# Altium PCB Weather Station PCB.PcbDoc
Units mm, origin at the board's own origin, x right, y up, seen from the top; angles counter-clockwise.
Board outline 62 x 38.05 mm, 2 copper layers (Top Layer, Bottom Layer), stack 1.671 mm thick; 27 components, 14 nets, 107 pads, 21 vias.
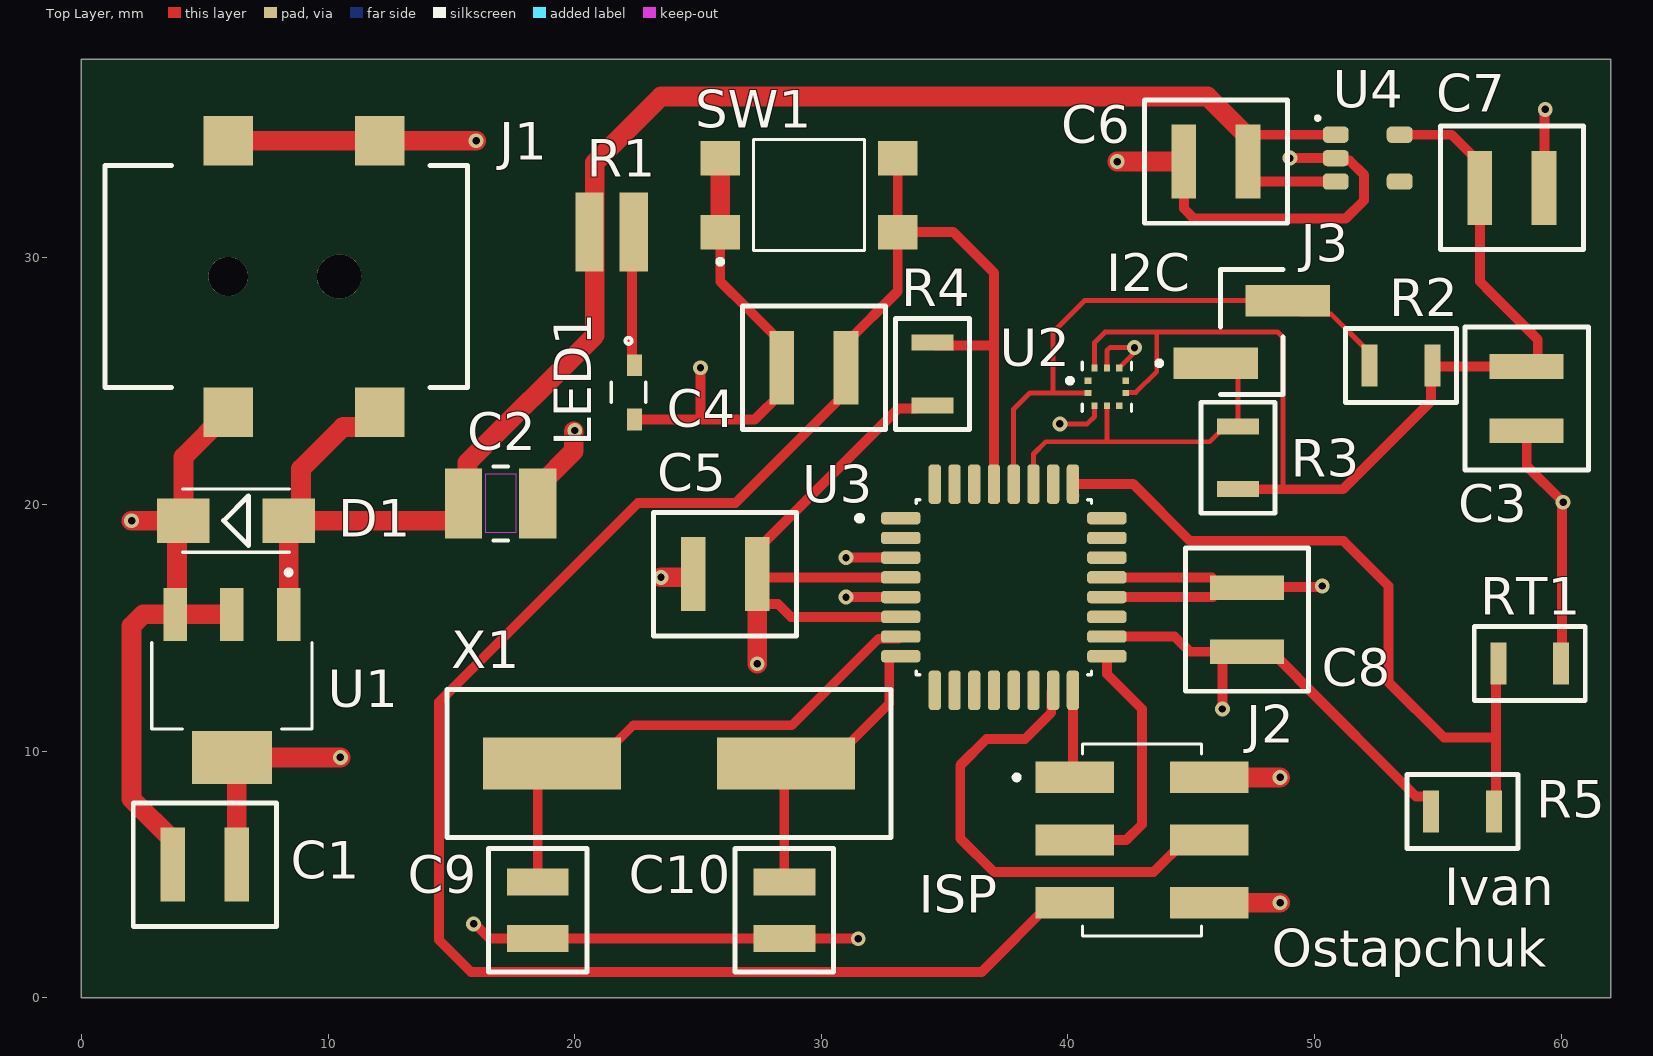
[diagram p0: Top Layer view]
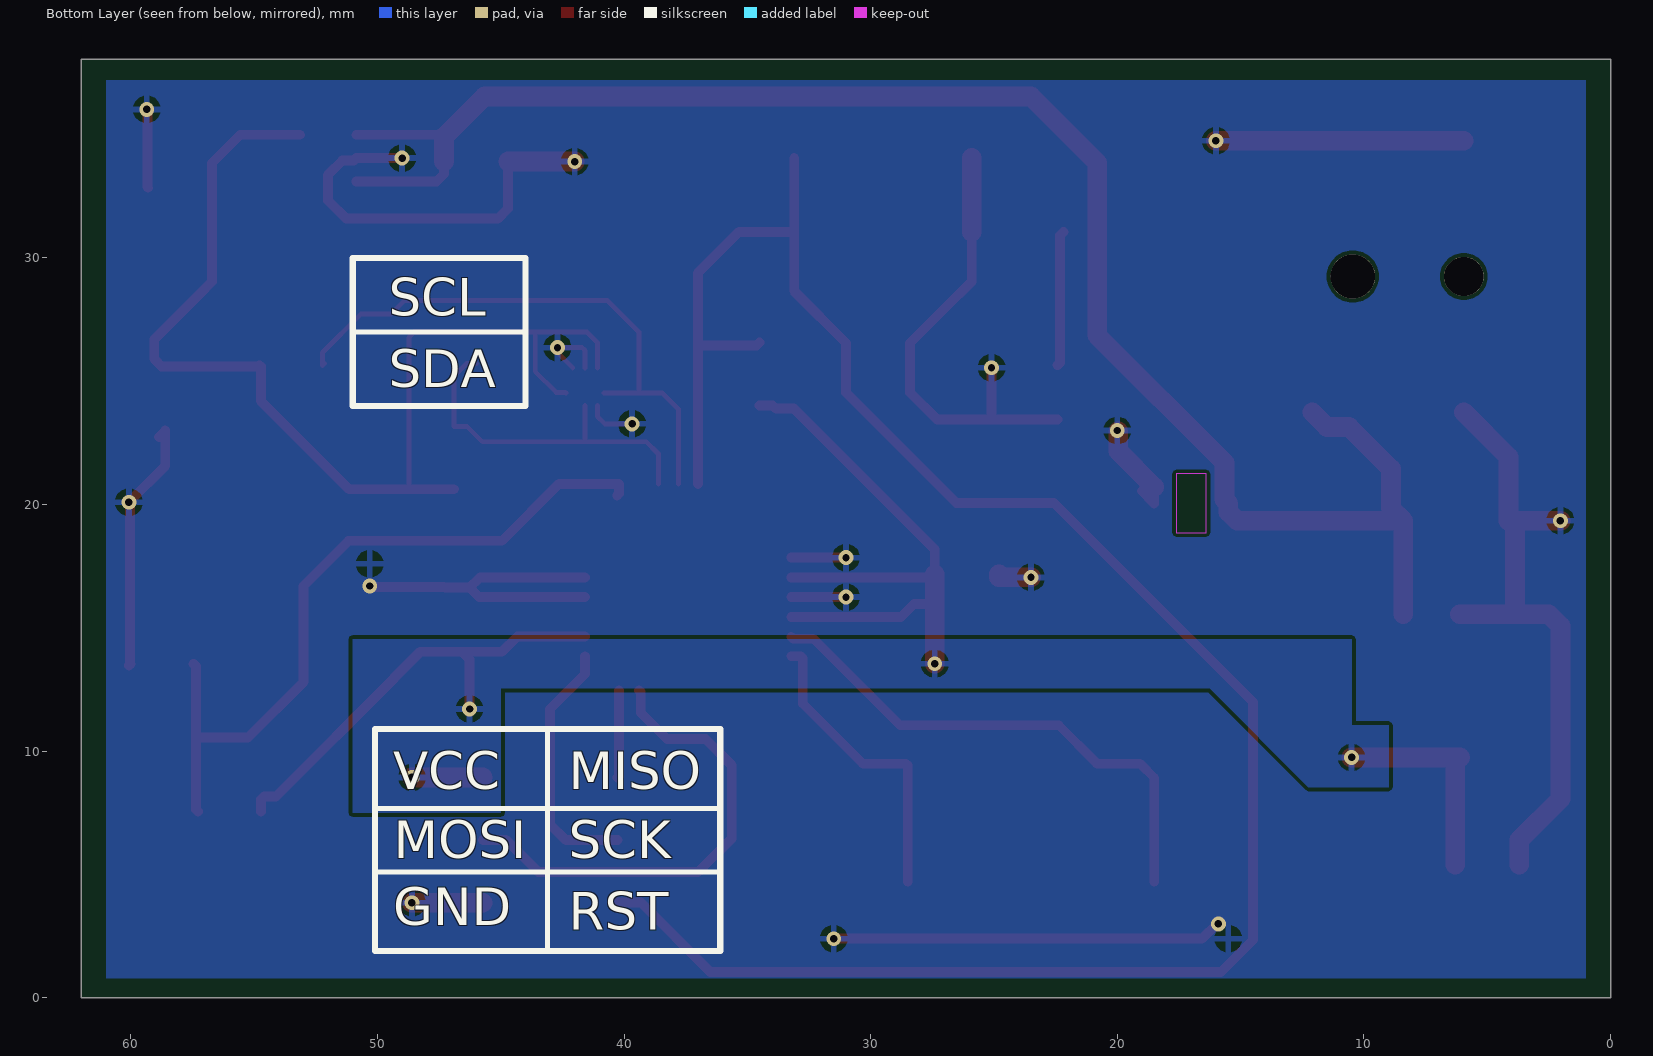
[diagram p1: Bottom Layer view, seen from below]
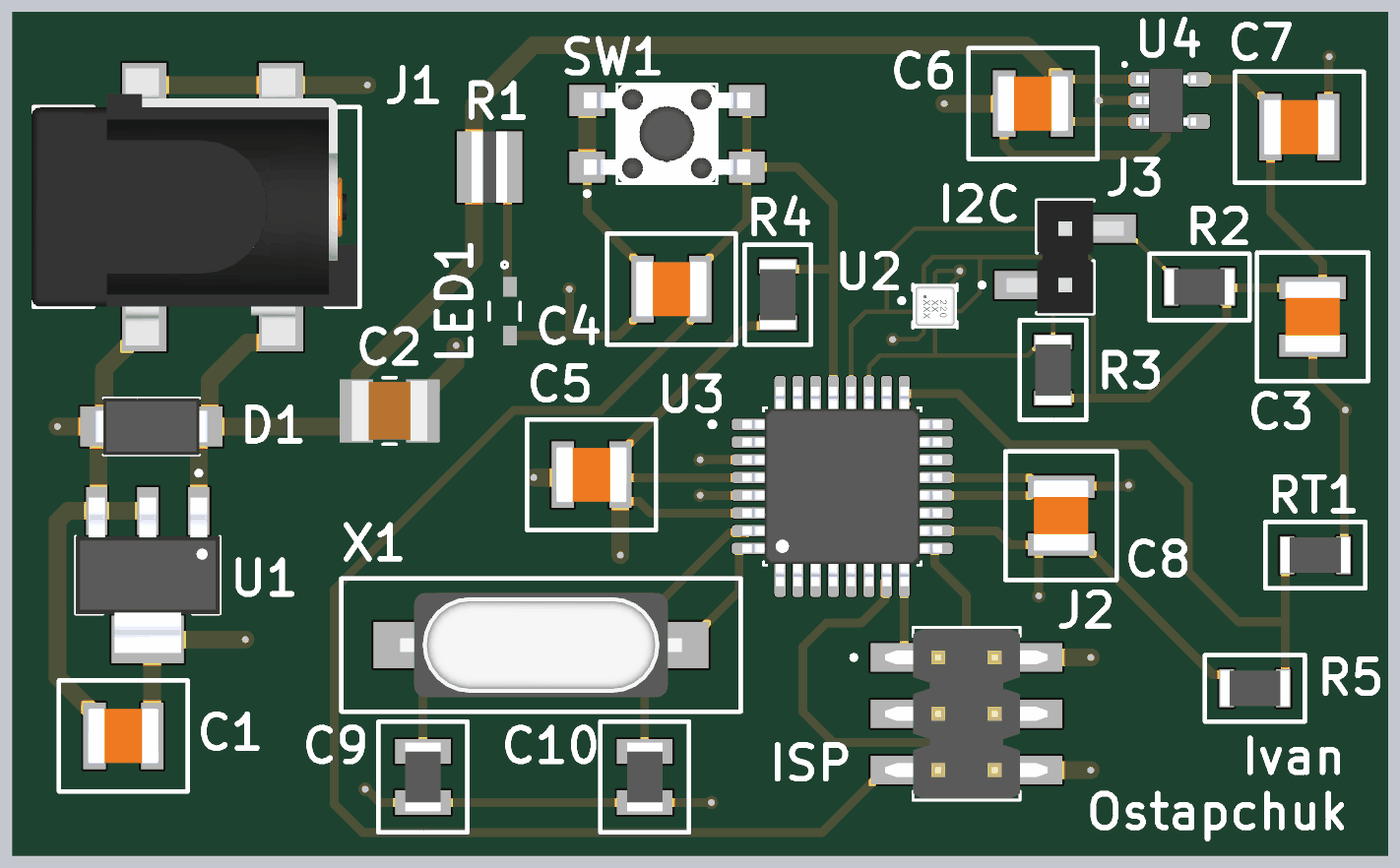
[diagram p2: 3D render of the assembled board from above, using the file's embedded part models]

## Layer stack, top to bottom
Top Solder: solder mask 0.0102, Solder Resist, Dk 3.5
Top Layer: signal copper 0.0356
Dielectric 1: dielectric 1.6, FR-4, Dk 4.8
Bottom Layer: signal copper 0.0356
Bottom Solder: solder mask 0.0102, Solder Resist, Dk 3.5

## Board outline
0,0 0,38.05 62,38.05 62,0

## Design rules (kind name [scope] priority, off if disabled: settings)
Clearance [All] p1: gap=0.15 ignorepadtopadclearanceinfootprint=FALSE
MinimumSolderMaskSliver [All] p1: minsoldermaskwidth=0.15
PolygonConnect [All] p1: connectstyle=Relief reliefconductorwidth=0.254 reliefentries=4 polygonreliefangle="90 Angle" airgapwidth=0.254
RoutingVias RoutingVias_1 [All] p1: holewidth=1 width=2 viastyle="Through Hole" minholewidth=1 minwidth=2 maxholewidth=1 maxwidth=2
SilkToSolderMaskClearance [IsPad] p1: minsilkscreentomaskgap=0.15 clearancetoexposedcopper=FALSE
SolderMaskExpansion [All] p1: expansion=0.102 istentingtop=FALSE
Width [All] p1: maxlimit=0.8 minlimit=0.2 preferedwidth=0.4
28 further rules are at their usual default settings.

## Components (designator, comment, footprint, x,y, rotation, side; value= is the part's Value field where it differs from the comment)
C1 "0.1 uF" 1210B104K500CT 5,5.4 r180 top
C2 "0.22uF" "Ceramic Cap 0.22uF 1210 Low density" 17,20.05 r0 top
C3 "0.1 uF" 1210B104K500CT 58.6,24.3 r90 top
C4 "0.1 uF" 1210B104K500CT 29.7,25.55 r0 top
C5 "0.1 uF" 1210B104K500CT 26.1,17.179 r0 top
C6 "0.1 uF" 1210B104K500CT 46,33.909 r180 top
C7 "0.1 uF" 1210B104K500CT 58,32.847 r0 top
C8 "0.1 uF" 1210B104K500CT 47.262,15.333 r270 top
C9 "30pF" "Kyocera 1210 Ceramic Capacitor" 18.5,3.55 r90 top
C10 "30pF" "Kyocera 1210 Ceramic Capacitor" 28.5,3.55 r90 top
D1 "TVS Protection" "Unidirectional TVS protection diode" 6.266,19.35 r0 top
J1 "DC Barrel Jack" "Power Barrel Jack" 8.3,29.25 r270 top
J2 "2x3 male header ISP" "2x3 male header ISP" 43,6.4 r270 top
J3 "2 PIN MALE HEADER" "2 pin male header smd" 47.45,27 r270 top
LED1 "Green LED IF 5mA" "SMD LED" 22.185,24.55 r270 top
R1 "620R" "1206 WIDE SMD Resistor" 21.5,31.05 r180 top
R2 "1kR" "Yageo 1206 SMD Resistor" 53.5,25.644 r180 top
R3 "1kR" "Yageo 1206 SMD Resistor" 46.9,21.9 r90 top
R4 "20kR" "Yageo 1206 SMD Resistor" 34.5,25.3 r90 top
R5 "10k" "Yageo 1206 SMD Resistor" 56,7.55 r0 top
RT1 "Thermistor 10K" "Yageo 1206 SMD Resistor" 58.725,13.55 r180 top
SW1 "Tactile Switch SPST" "Tactile Switch" 29.5,32.55 r90 top
U1 "Linear V Regulator" LM7805MP/NOPB 6.1,12.65 r270 top
U2 "Pressure Sensor" XDCR_ENS220S-BLGT 41.58,24.775 r0 top
U3 "MCU ATMEGA-328P" QFP80P900X900X120-32N 37.4,16.65 r0 top
U4 "LDO Regulator 1.8V" "LDO 1.8V" 52,34.05 r0 top
X1 "12.MHz" ABLS-12.000MHZ-20-B-3-H-T 23.825,9.5 r180 top

## Footprints (in the part's own frame and the unit in brackets; to place one, negate y for a bottom-side part, rotate by r counter-clockwise, add the part's x,y. Pads: shape width x height; smd on the part's side, far side on the other; paste and mask are expansions set on the pad)
"2 pin male header smd" [mm] "SAMTEC_TSM-102-01-X-SV"
  rect 1.27x3.43 smd: 1(1.27,-1.46) 2(-1.27,1.46)
  silkscreen extent -2.54,-3.85 2.54,1.27, body extent -2.54,-2.64 2.54,2.64, height 9.66
"2x3 male header ISP" [mm] "AMPHENOL_10125394-T0803ALF"
  rect 1.27x3.18 smd: 1(-2.54,-2.73) 2(0,-2.73) 3(2.54,-2.73) 4(2.54,2.73) 5(0,2.73) 6(-2.54,2.73)
  silkscreen extent -3.89,-5.18 3.89,2.41, body extent -3.81,-3.68 3.81,3.68, height 9.69
"1206 WIDE SMD Resistor" [mm] "RESC1632X65N"
  rect 1.15x3.2 smd: 1(-0.9,0) 2(0.9,0)
  body extent -0.8,-1.6 0.8,1.6, height 0.66
1210B104K500CT [mm]
  rect 1x3 smd: 1(-1.3,0) 2(1.3,0)
  silkscreen extent -2.9,-2.5 2.9,2.5, body extent -1.6,-1.25 1.6,1.25, height 1.06
ABLS-12.000MHZ-20-B-3-H-T [mm]
  rect 5.6x2.1 smd: 1(-4.75,0) 2(4.75,0)
  silkscreen extent -9,-3 9,3, body extent -6.35,-2.35 6.35,2.35, height 4.18
"Ceramic Cap 0.22uF 1210 Low density" [mil] "CAPC340270_100N_KEM-M"
  rect 59.4x112 smd paste+0 mask+0: 1(-59.23,0) 2(59.23,0)
  Top Layer keep-out region: -23.62,-47.24 -23.62,47.24 23.62,47.24 23.62,-47.24
  Keep-Out Layer region: -23.62,-47.24 -23.62,47.24 23.62,47.24 23.62,-47.24
  silkscreen extent -12,-59 12,59, body extent -67,-53 67,53, height 39
"Kyocera 1210 Ceramic Capacitor" [mm]
  rect 1.1x2.51 smd: 1(-1.15,0) 2(1.15,0)
  silkscreen extent -2.5,-2 2.5,2, body extent -1.55,-0.8 1.55,0.8, height 0.66
"LDO 1.8V" [mm] "SOT23-5P95_280X145XL45X37N"
  rrect53% 1.05x0.66 smd mask+0.05: 1(-1.14,0.95) 2(-1.14,0) 3(-1.14,-0.95) 4(1.45,-0.95) 5(1.45,0.95)
  silkscreen extent -1.9,1.6 -1.85,1.65, body extent -1.35,-1.45 1.35,1.45, height 1.45
LM7805MP/NOPB [mm] "Linear Voltage Regulator LM7805"
  rect 2.15x0.95 smd: 1(-2.9,2.3) 2(-2.9,0) 3(-2.9,-2.3)
  rect 2.15x3.25 smd: 4(2.9,0)
  silkscreen extent -4.7,-3.25 1.75,3.25, body extent -3.5,-3.25 3.5,3.25, height 1.8
"Power Barrel Jack" [mm] "GCT_DCJ200-05-A-XX-X_REVA"
  rect 2x2 smd: 1(-5.5,3.8) 1(-5.5,-2.35) 2(5.5,-2.35) 3(5.5,3.8)
  round 1.8 hole 1.8 unplated: ""(0,2.15)
  round 1.6 hole 1.6 unplated: ""(0,-2.35)
  silkscreen extent -4.5,-7.35 4.5,7.35, body extent -6.25,-7.45 6.25,7.25, height 11.01
QFP80P900X900X120-32N [mm]
  rrect53% 1.6x0.5 smd mask+0.05: 1(-4.18,2.8) 2(-4.18,2) 3(-4.18,1.2) 4(-4.18,0.4) 5(-4.18,-0.4) 6(-4.18,-1.2) 7(-4.18,-2) 8(-4.18,-2.8) 17(4.18,-2.8) 18(4.18,-2) 19(4.18,-1.2) 20(4.18,-0.4) 21(4.18,0.4) 22(4.18,1.2) 23(4.18,2) 24(4.18,2.8)
  rrect53% 0.5x1.6 smd mask+0.05: 9(-2.8,-4.18) 10(-2,-4.18) 11(-1.2,-4.18) 12(-0.4,-4.18) 13(0.4,-4.18) 14(1.2,-4.18) 15(2,-4.18) 16(2.8,-4.18) 25(2.8,4.18) 26(2,4.18) 27(1.2,4.18) 28(0.4,4.18) 29(-0.4,4.18) 30(-1.2,4.18) 31(-2,4.18) 32(-2.8,4.18)
  silkscreen extent -5.95,-3.55 3.55,3.55, body extent -4.5,-4.5 4.5,4.5, height 1.2
"SMD LED" [mil] "LED_IN-S85_INL"
  rect 35x24 smd paste+0 mask+0: 1(-43.31,9.5) 2(43.31,9.5)
  silkscreen extent -87,-28 16,28
"Tactile Switch" [mm] "SW_TL3305AF260QG"
  rect 1.4x1.6 smd: 1(-1.5,3.6) 2(-1.5,-3.6) 3(1.5,3.6) 4(1.5,-3.6)
  silkscreen extent -2.8,-2.25 2.25,3.7, body extent -2.25,-3.75 2.25,3.75, height 3.8
"Unidirectional TVS protection diode" [mil] "DIOM4325X250N"
  rect 84x70.87 smd: 1(-84,0) 2(84,0)
  silkscreen extent -85,-50 85,50, body extent -101,-50 101,50, height 99
XDCR_ENS220S-BLGT [mm]
  rect 0.275x0.25 smd mask+0.05: 1(-0.763,0.25) 2(-0.763,-0.25) 6(0.763,-0.25) 7(0.763,0.25)
  rect 0.25x0.275 smd mask+0.05: 3(-0.5,-0.763) 4(0,-0.763) 5(0.5,-0.763) 8(0.5,0.763) 9(0,0.763) 10(-0.5,0.763)
  silkscreen extent -1.6,-1 1,1, body extent -1,-1 1,1, height 0.75
"Yageo 1206 SMD Resistor" [mm] "RC1206FR-0720KL"
  rect 0.65x1.7 smd: 1(-1.275,0) 2(1.275,0)
  silkscreen extent -2.25,-1.5 2.25,1.5, body extent -1.55,-0.8 1.55,0.8, height 0.66

## Part data
C1 C3 C4 C5 C6 C7 C8: library part "Ceramic Cap, 0.1 uF, 10%, 50 V, 1210", "CerCapacitor, 0.1 uF, 10%, X7R, 50 V, 1210 [3225 Metric] Rohs Compliant: Yes", Capacitance=100nF, Case Code (Imperial)=1210, Case Code (Metric)=3225, Case/Package=Ceramic, Dielectric=X7R, Manufacturer="Walsin Technologies", Manufacturer Part Number=1210B104K500CT, Max Operating Temperature=125°C, Min Operating Temperature=-55°C, Supplier Part Number 1=1292-1618-6-ND, Tolerance=10%, Voltage Rating=50V, Category="Ceramic Capacitors", ComponentLink1Description=https://datasheet.ciiva.com/26864/getdatasheetpartid-414729-26864951.pdf?src-supplier=Verical, ComponentLink1URL=https://datasheet.ciiva.com/26864/getdatasheetpartid-414729-26864951.pdf?src-supplier=Verical, Depth=2.5mm, Lead Free=5697LeadFree, Length=3.2mm, Packaging="Tape and Reel", Pricing 1="1=0,23, 10=0,133, 50=0,0944, 100=0,0824, 500=0,06194, 1000=0,05558 (USD)", Radiation Hardening=No, Reach SVHC Compliant=Unknown, RoHS=Yes, RoHS Compliant=Yes, Stock 1=2921, Supplier 1=Digikey, Voltage Rating (DC)=50V
C2: library part "Ceramic Cap, 0.22uF, 10%, 50V, 1210", "Multilayer Ceramic Capacitors MLCC - SMD/SMT 50V 0.22uF X7R 1210 10%", Capacitance=220nF, Case Code (Imperial)=1210, Case Code (Metric)=3225, Dielectric=X7R, Dielectric Material=Ceramic, Manufacturer=KEMET, Manufacturer Part Number=C1210C224K5RACTU, Max Operating Temperature=125°C, Min Operating Temperature=-55°C, Package Quantity=1, Supplier Part Number 1=399-C1210C224K5RAC7800DKR-ND, Tolerance=10%, Voltage=50V, Case/Package=1210, Category="Ceramic Capacitors", ComponentLink1Description=https://datasheet.ciiva.com/5969/kem-c1002-x7r-smd-5969839.pdf?src-supplier=Farnell, ComponentLink1URL=https://datasheet.ciiva.com/5969/kem-c1002-x7r-smd-5969839.pdf?src-supplier=Farnell, ComponentLink2Description=https://datasheet.ciiva.com/7807/kem-c1002-x7r-smd-7807526.pdf?src-supplier=Element14, ComponentLink2URL=https://datasheet.ciiva.com/7807/kem-c1002-x7r-smd-7807526.pdf?src-supplier=Element14, ComponentLink3Description=https://datasheet.ciiva.com/28682/1851736-28682447.pdf?src-supplier=Element14, ComponentLink3URL=https://datasheet.ciiva.com/28682/1851736-28682447.pdf?src-supplier=Element14, Construction=Flat, Depth=2.5mm, Height=0.9mm, Lead Free=5697LeadFree, Length=3.2mm, Mount="Surface Mount,PCB", Number of Pins=2, Packaging="Tape and Reel", Pricing 1="1=0,26, 10=0,169, 50=0,1242, 100=0,1012, 500=0,07988, 1000=0,06745 (USD)", Radiation Hardening=No, Reach SVHC Compliant=No, RoHS=Yes, RoHS Compliant=Yes, Series=C, Stock 1=44512, Supplier 1=Digikey, Termination=SMD/SMT, Thickness=0.039inch, Voltage Rating=50V, Voltage Rating (DC)=50V, Width=0.098inch
C9 C10: library part "Ceramic Cap, 30pF, ±5%, 200V, 1210", "30 pF ±5% 200V Ceramic Capacitor C0G, NP0 1210 (3225 Metric)", Manufacturer="Kyocera AVX", Manufacturer Part Number=KGQ32DCG2D300JT, Supplier Part Number 1=478-KGQ32DCG2D300JTCT-ND, Pricing 1="1=0,65, 10=0,39, 50=0,2872, 100=0,2553, 500=0,20086, 1000=0,18387 (USD)", RoHS=No, Stock 1=5835, Supplier 1=Digikey
D1: library part "Unidirectional TVS protection Diode", "Unidirectional TVS protection. SMAJ Series 10 V 400 W SMT Uni-Directional Transient Voltage Suppressor - SMA", Manufacturer=Littelfuse, Manufacturer Part Number=SMAJ10A, Supplier Part Number 1=SMAJ10ALFCT-ND, Category="TVS Diodes", ComponentLink1Description=https://datasheet.ciiva.com/330/littelfuse-tvs-diode-smaj-datasheet-pdf-330790.pdf?src-supplier=Digikey, ComponentLink1URL=https://datasheet.ciiva.com/330/littelfuse-tvs-diode-smaj-datasheet-pdf-330790.pdf?src-supplier=Digikey, ComponentLink2Description=https://datasheet.ciiva.com/330/littelfuse-tvs-diode-smaj-datasheet-pdf-330791.pdf?src-supplier=Digikey, ComponentLink2URL=https://datasheet.ciiva.com/330/littelfuse-tvs-diode-smaj-datasheet-pdf-330791.pdf?src-supplier=Digikey, ComponentLink3Description=https://datasheet.ciiva.com/330/littelfuse-tvs-diode-smaj-datasheet-pdf-330792.pdf?src-supplier=Digikey, ComponentLink3URL=https://datasheet.ciiva.com/330/littelfuse-tvs-diode-smaj-datasheet-pdf-330792.pdf?src-supplier=Digikey, ComponentLink4Description=https://datasheet.ciiva.com/8062/littelfuse-tvs-diode-smaj-8062262.pdf?src-supplier=Element14, ComponentLink4URL=https://datasheet.ciiva.com/8062/littelfuse-tvs-diode-smaj-8062262.pdf?src-supplier=Element14, Pricing 1="1=0,4, 10=0,287, 100=0,1449, 500=0,12844, 1000=0,09996, 2000=0,08947 (USD)", RoHS=Yes, Stock 1=44201, Supplier 1=Digikey
J1: library part "Barrel Connector Jack", "Power Barrel Connector Jack 2.05mm ID (0.081\"), 5.50mm OD (0.217\") Surface Mount, Right Angle", Manufacturer="Global Connector Technology", Manufacturer Part Number=DCJ200-05-A-K1-A, Supplier Part Number 1=2073-DCJ200-05-A-K1-ACT-ND, Category=Connectors, ComponentLink1Description=https://datasheet.octopart.com/DCJ200-05-A-K1-A-Global-Connector-Technology-datasheet-77992270.pdf?src-supplier=Future+Electronics, ComponentLink1URL=https://datasheet.octopart.com/DCJ200-05-A-K1-A-Global-Connector-Technology-datasheet-77992270.pdf?src-supplier=Future+Electronics, ComponentLink2Description=https://gct.co/files/drawings/dcj200-05.pdf?src-supplier=Digikey, ComponentLink2URL=https://gct.co/files/drawings/dcj200-05.pdf?src-supplier=Digikey, ComponentLink3Description=https://datasheet.octopart.com/DCJ200-05-A-K1-A-Global-Connector-Technology-datasheet-91940685.pdf?src-supplier=Farnell, ComponentLink3URL=https://datasheet.octopart.com/DCJ200-05-A-K1-A-Global-Connector-Technology-datasheet-91940685.pdf?src-supplier=Farnell, ComponentLink4Description=http://www.farnell.com/cad/1884037.pdf?src-supplier=Element14, ComponentLink4URL=http://www.farnell.com/cad/1884037.pdf?src-supplier=Element14, Pricing 1="1=1,02, 10=0,859, 25=0,8236, 50=0,806, 100=0,771 (USD)", RoHS=Yes, Stock 1=1981, Supplier 1=Digikey
J2: "Bs Dr Vt SMT Hdr 2X3 TR-10125394-T0803ALF", Manufacturer="Amphenol Communications Solutions", Manufacturer Part Number=10125394-T0803ALF, Category="Backplane Connectors", Pricing 1="1=0,66, 10=0,5 (USD)", RoHS=No, Stock 1=2253, Supplier 1=Digikey
J3: library part "2 pin male header", "Conn Unshrouded Header HDR 2 POS 2.54mm Solder ST SMD Automotive T/R", Manufacturer=Samtec, Manufacturer Part Number=TSM-102-01-T-SV-TR, Supplier Part Number 1=SAM14779DKR-ND, Category="Headers and Wire Housings", ComponentLink1Description=http://www.farnell.com/datasheets/1927672.pdf?src-supplier=Farnell, ComponentLink1URL=http://www.farnell.com/datasheets/1927672.pdf?src-supplier=Farnell, ComponentLink2Description=https://datasheet.octopart.com/TSM-102-01-T-SV-TR-Samtec-datasheet-41643181.pdf?src-supplier=Newark, ComponentLink2URL=https://datasheet.octopart.com/TSM-102-01-T-SV-TR-Samtec-datasheet-41643181.pdf?src-supplier=Newark, ComponentLink3Description=http://suddendocs.samtec.com/catalog_english/tsm.pdf?src-supplier=Digikey, ComponentLink3URL=http://suddendocs.samtec.com/catalog_english/tsm.pdf?src-supplier=Digikey, ComponentLink4Description=http://www.samtec.com/documents/webfiles/pdf/TSM.PDF?src-supplier=Avnet, ComponentLink4URL=http://www.samtec.com/documents/webfiles/pdf/TSM.PDF?src-supplier=Avnet, ComponentLink5Description=https://datasheet.octopart.com/TSM-102-01-T-SV-TR-Samtec-datasheet-97319594.pdf?src-supplier=Sager+Electronics, ComponentLink5URL=https://datasheet.octopart.com/TSM-102-01-T-SV-TR-Samtec-datasheet-97319594.pdf?src-supplier=Sager+Electronics, ComponentLink6Description=https://datasheet.octopart.com/TSM-102-01-T-SV-TR-Samtec-datasheet-116533474.pdf?src-supplier=Toby+Electronics, ComponentLink6URL=https://datasheet.octopart.com/TSM-102-01-T-SV-TR-Samtec-datasheet-116533474.pdf?src-supplier=Toby+Electronics, ComponentLink7Description=https://datasheet.octopart.com/TSM-102-01-T-SV-TR-Samtec-datasheet-141160580.pdf?src-supplier=Master+Electronics, ComponentLink7URL=https://datasheet.octopart.com/TSM-102-01-T-SV-TR-Samtec-datasheet-141160580.pdf?src-supplier=Master+Electronics, Pricing 1="1=0,22 (USD)", RoHS=Yes, Stock 1=4232, Supplier 1=Digikey
LED1: "Side View / 0805 / 2.1 X 1.0 X 0", Manufacturer=Inolux, Manufacturer Part Number=IN-S85CS5G, Supplier Part Number 1=1830-IN-S85CS5GDKR-ND, Category=LEDs, Pricing 1="1=0,25, 10=0,166, 100=0,1109, 500=0,07668, 1000=0,0639 (USD)", RoHS=No, Stock 1=4626, Supplier 1=Digikey
R1: library part "SMD Resistor 620 Ohms, 1.5W 1206 WIDE", "620 Ohms ±1% 1.5W Chip Resistor Wide 1206 (3216 Metric), 0612 Automotive AEC-Q200, Pulse Withstanding Thick Film", Case Code (Imperial)=1206, Case Code (Metric)=3216, Case/Package=0612, Manufacturer=Rohm, Manufacturer Part Number=LTR18EZPF6200, Max Operating Temperature=155°C, Max Power Dissipation=750mW, Min Operating Temperature=-55°C, Ratings=AEC-Q200, Supplier Part Number 1=RHM620YCT-ND, Temperature Coefficient=100ppm/°C, Tolerance=1%, Voltage Rating=200V, Category="Chip SMD Resistors", ComponentLink1Description=https://datasheet.ciiva.com/2470/ltr-2470303.pdf?src-supplier=Digikey, ComponentLink1URL=https://datasheet.ciiva.com/2470/ltr-2470303.pdf?src-supplier=Digikey, ComponentLink2Description=https://datasheet.ciiva.com/2470/ltr-2470304.pdf?src-supplier=Digikey, ComponentLink2URL=https://datasheet.ciiva.com/2470/ltr-2470304.pdf?src-supplier=Digikey, ComponentLink3Description=https://datasheet.ciiva.com/2470/ltr-2470305.pdf?src-supplier=Digikey, ComponentLink3URL=https://datasheet.ciiva.com/2470/ltr-2470305.pdf?src-supplier=Digikey, Features="Automotive AEC-Q200", Number of Terminations=2, Packaging="Cut Tape", Pricing 1="1=0,2, 10=0,107, 50=0,073, 100=0,0629, 500=0,04618, 1000=0,0409 (USD)", Resistance=620R, RoHS=No, RoHS Compliant=No, Series=LTR, Stock 1=8335, Supplier 1=Digikey
R2 R3: library part "SMD Resistor 1 kOhm, 250mW, 1206", "SMD Chip Resistor, 1 kOhm, ± 1%, 250 mW, 1206 [3216 Metric], Thick Film, General Purpose", Case Code (Imperial)=1206, Case Code (Metric)=3216, Manufacturer=Yageo, Manufacturer Part Number=RC1206FR-071KL, Max Operating Temperature=155°C, Min Operating Temperature=-55°C, Power Rating=250mW, Resistance Tolerance=1%, Resistor Type="Thick Film", Supplier Part Number 1=311-1.00KFRDKR-ND, Temperature Coefficient=100ppm/°C, Voltage Rating=200V, Case/Package=1206, Category="Chip SMD Resistors", Depth=1.6mm, Height=0.55mm, Lead Free="Lead Free", Length=3.1mm, Packaging="Tape and Reel", Pricing 1="1=0,1, 10=0,038, 50=0,0244, 100=0,0206, 500=0,01434, 1000=0,01248 (USD)", Reach SVHC Compliant=Unknown, Resistance=1kR, RoHS=Yes, RoHS Compliant=Yes, Series=RC, Size Code=1206, Stock 1=367793, Supplier 1=Digikey, Technology="THICK FILM", Termination=SMD/SMT, Tolerance=1%, Voltage Rating (AC)=200V
R4: library part "SMD Resistor, 20k Ohm, 250mW, 1206", "20 kOhm, ± 1%, 250 mW, SMD Resistor, 1206 [3216 Metric], Thick Film, General Purpose", Manufacturer=Yageo, Manufacturer Part Number=RC1206FR-0720KL, Supplier Part Number 1=311-20.0KFRCT-ND, Voltage Rating (DC)=200V, Category="Chip SMD Resistors", ComponentLink1Description=http://www.yageo.com/documents/recent/PYu-RC_Group_51_RoHS_L_9.pdf?src-supplier=Digikey, ComponentLink1URL=http://www.yageo.com/documents/recent/PYu-RC_Group_51_RoHS_L_9.pdf?src-supplier=Digikey, ComponentLink2Description=http://www.yageo.com/documents/recent/PYu-RC_Group_51_RoHS_L_10.pdf?src-supplier=Digikey, ComponentLink2URL=http://www.yageo.com/documents/recent/PYu-RC_Group_51_RoHS_L_10.pdf?src-supplier=Digikey, Lead Free=5697LeadFree, Pricing 1="1=0,1, 10=0,038, 50=0,0244, 100=0,0206, 500=0,01434, 1000=0,01248 (USD)", RoHS=Yes, Stock 1=254185, Supplier 1=Digikey
R5: library part "SMD Resistor, 10 kOhm, 250 mW, 1206", "SMD Chip Resistor, 10 kOhm, 1%, 250 mW, 1206 [3216 Metric], Thick Film, General Purpose", Case Code (Imperial)=1206, Case Code (Metric)=3216, Manufacturer=Yageo, Manufacturer Part Number=RC1206FR-0710KL, Max Operating Temperature=155°C, Max Power Dissipation=250mW, Min Operating Temperature=-55°C, Package Quantity=5000, Resistance=10kR, Resistance Tolerance=1%, Resistor Type="Thick Film", Supplier Part Number 1=311-10.0KFRCT-ND, Temperature Coefficient=100ppm/°C, Voltage Rating=200V, Case/Package=1206, Category="Chip SMD Resistors", ComponentLink1Description=https://datasheet.ciiva.com/46445/444357-46445703.pdf?src-supplier=Element14, ComponentLink1URL=https://datasheet.ciiva.com/46445/444357-46445703.pdf?src-supplier=Element14, ComponentLink2Description=https://datasheet.ciiva.com/7857/1692832-7857244.pdf?src-supplier=Element14, ComponentLink2URL=https://datasheet.ciiva.com/7857/1692832-7857244.pdf?src-supplier=Element14, ComponentLink3Description=https://datasheet.ciiva.com/7857/1692832-7857245.pdf?src-supplier=Element14, ComponentLink3URL=https://datasheet.ciiva.com/7857/1692832-7857245.pdf?src-supplier=Element14, Features="Moisture Resistant", Height=0.55mm, Lead Free=5697LeadFree, Length=3.1mm, Number of Terminations=2, Packaging="Tape and Reel", Power Rating=250mW, Pricing 1="1=0,1, 10=0,038, 50=0,0244, 100=0,0206, 500=0,01434, 1000=0,01248 (USD)", Reach SVHC Compliant=Unknown, RoHS=Yes, RoHS Compliant=Yes, Series=RC, Size Code=1206, Stock 1=2825737, Supplier 1=Digikey, Termination=SMD/SMT, Tolerance=1%, Voltage Rating (AC)=200V, Width=1.6mm
RT1: library part "Thermistor NTC 10K", "Thermistor NTC 10K Ohm 10% 2-Pin 1206 Surface Mount Solder Pad 3510K Blister T/R", Case/Package=1206, Manufacturer="TDK EPCOS", Manufacturer Part Number=B57621C5103K062, Max Operating Temperature=125°C, Min Operating Temperature=-55°C, Package Quantity=4000, Power Rating=300mW, Resistance=10kR, Supplier Part Number 1=495-B57621C5103K062CT-ND, Tolerance=10%, Category=Thermistors, ComponentLink1Description=https://datasheet.ciiva.com/15097/getdatasheetpartid-382188-15097872.pdf?src-supplier=Verical, ComponentLink1URL=https://datasheet.ciiva.com/15097/getdatasheetpartid-382188-15097872.pdf?src-supplier=Verical, Depth=1.6mm, Height=1.3mm, Length=3.2mm, Number of Pins=2, Packaging="Tape and Reel", Pricing 1="1=1,17, 10=0,878, 25=0,7024, 100=0,6439, 500=0,5415, 1000=0,48295 (USD)", Radiation Hardening=No, RoHS=Yes, RoHS Compliant=Yes, Stock 1=7290, Supplier 1=Digikey, Termination=SMD/SMT, Weight=0.000635oz, Width=1.6mm
SW1: "TL3305A Series SPST 12 V 4.5 x 4.5 mm 260 gf Top Actuated SMT Tactile Switch", Manufacturer=E-Switch, Manufacturer Part Number=TL3305AF260QG, Max Operating Temperature=70°C, Min Operating Temperature=-20°C, Operating Force=260gf, Supplier Part Number 1=EG5353DKR-ND, Actuator Type=Standard, Category="Tactile Switches", ComponentLink1Description=http://www.farnell.com/datasheets/2554191.pdf?src-supplier=Farnell, ComponentLink1URL=http://www.farnell.com/datasheets/2554191.pdf?src-supplier=Farnell, ComponentLink2Description=http://www.farnell.com/datasheets/2554191.pdf?src-supplier=Newark, ComponentLink2URL=http://www.farnell.com/datasheets/2554191.pdf?src-supplier=Newark, ComponentLink3Description=http://spec_sheets.e-switch.com/specs/P010471.pdf?src-supplier=Mouser, ComponentLink3URL=http://spec_sheets.e-switch.com/specs/P010471.pdf?src-supplier=Mouser, ComponentLink4Description=http://www.farnell.com/datasheets/2554191.pdf?src-supplier=Element14, ComponentLink4URL=http://www.farnell.com/datasheets/2554191.pdf?src-supplier=Element14, ComponentLink5Description=http://spec_sheets.e-switch.com/specs/P010471.pdf?src-supplier=Digikey, ComponentLink5URL=http://spec_sheets.e-switch.com/specs/P010471.pdf?src-supplier=Digikey, ComponentLink6Description=http://spec_sheets.e-switch.com/specs/P010471.pdf?src-supplier=NAC+Semi, ComponentLink6URL=http://spec_sheets.e-switch.com/specs/P010471.pdf?src-supplier=NAC+Semi, Illumination Type=Non-Illuminated, Lead Free="Lead Free", Mechanical Life=200000Cycles, Mount="Surface Mount", Packaging="Cut Tape", Pricing 1="1=0,21, 10=0,205, 25=0,1944, 100=0,176, 250=0,16048, 500=0,14918, 1000=0,12726 (USD)", RoHS=No, Series=TL3305, Stock 1=157478, Supplier 1=Digikey, Switch Function=Off-Mom, Switch Travel=0.2mm, Termination="Gull Wing", Throw Configuration=SPST
U1: library part "Linear Voltage Regulator LM7805MP/NOPB", "1.5-A, 30-V, linear voltage regulator 4-SOT-223 0 to 125", Dropout Voltage=2V, Manufacturer="Texas Instruments", Manufacturer Part Number=LM7805MP/NOPB, Max Supply Voltage=30V, Min Supply Voltage=7.5V, Nominal Supply Current=8mA, Output Voltage=5V, Supplier Part Number 1=296-44517-1-ND, Accuracy=3%, Category="Voltage Regulators - Linear", ComponentLink1Description=http://www.ti.com/general/docs/suppproductinfo.tsp?distId=10&amp;gotoUrl=http%3A%2F%2Fwww.ti.com%2Flit%2Fgpn%2Flm340&src-supplier=Digikey, ComponentLink1URL=http://www.ti.com/general/docs/suppproductinfo.tsp?distId=10&amp;gotoUrl=http%3A%2F%2Fwww.ti.com%2Flit%2Fgpn%2Flm340&src-supplier=Digikey, Height=1.8mm, Lead Free=5698LeadFree, Length=6.5mm, Number of Outputs=1NUMBER, Number of Pins=4NUMBER, Pricing 1="1=1,73, 10=1,555, 25=1,4672, 100=1,2499, 250=1,1736, 500=1,02692 (USD)", RoHS=Yes, Stock 1=2585, Supplier 1=Digikey, Thickness=1.6mm, Width=3.5mm
U2: "Pressure Sensor 4.35PSI ~ 17.4PSI (30kPa ~ 120kPa) Absolute 24 b 10-LGA", Manufacturer=ScioSense, Manufacturer Part Number=ENS220S-BLGT, Supplier Part Number 1=2618-ENS220S-BLGTCT-ND, Pricing 1="1=3,45, 10=2,591, 25=2,3028, 50=2,1876, 100=2,1301, 500=1,78468, 1000=1,66953 (USD)", RoHS=No, Stock 1=2645, Supplier 1=Digikey
U3: "AVR series Microcontroller IC 8-Bit 2MHz 32KB (16K x 16) FLASH 32-TQFP (7x7)", Case/Package=TQFP, Manufacturer=Microchip, Manufacturer Part Number=ATMEGA328P-AUR, Max Frequency=20MHz, Max Operating Temperature=85°C, Max Supply Voltage=5.5V, Min Operating Temperature=-40°C, Min Supply Voltage=1.8V, Supplier Part Number 1=ATMEGA328P-AURCT-ND, Category=Microcontrollers, ComponentLink1Description=http://www.farnell.com/datasheets/2047852.pdf?src-supplier=Farnell, ComponentLink1URL=http://www.farnell.com/datasheets/2047852.pdf?src-supplier=Farnell, ComponentLink2Description=http://components.arrow.com/part/dataview/48719204S8832641N3744?src-supplier=Arrow+Electronics, ComponentLink2URL=http://components.arrow.com/part/dataview/48719204S8832641N3744?src-supplier=Arrow+Electronics, ComponentLink3Description=http://www.produktinfo.conrad.com/datenblaetter/1200000-1299999/001267077-da-01-en-IC_MCU_8BIT_3_ATMEGA328P_AUR_TQFP_32_ATM.pdf?src-supplier=Conrad, ComponentLink3URL=http://www.produktinfo.conrad.com/datenblaetter/1200000-1299999/001267077-da-01-en-IC_MCU_8BIT_3_ATMEGA328P_AUR_TQFP_32_ATM.pdf?src-supplier=Conrad, ComponentLink4Description=https://datasheet.octopart.com/ATMEGA328P-AUR-Microchip-datasheet-14421303.pdf?src-supplier=Newark, ComponentLink4URL=https://datasheet.octopart.com/ATMEGA328P-AUR-Microchip-datasheet-14421303.pdf?src-supplier=Newark, ComponentLink5Description=http://www.farnell.com/datasheets/2047852.pdf?src-supplier=Element14, ComponentLink5URL=http://www.farnell.com/datasheets/2047852.pdf?src-supplier=Element14, ComponentLink6Description=https://datasheet.octopart.com/ATMEGA328P-AUR-Microchip-datasheet-101746195.pdf?src-supplier=Future+Electronics, ComponentLink6URL=https://datasheet.octopart.com/ATMEGA328P-AUR-Microchip-datasheet-101746195.pdf?src-supplier=Future+Electronics, ComponentLink7Description=http://www.farnell.com/datasheets/1693866.pdf?src-supplier=Newark, ComponentLink7URL=http://www.farnell.com/datasheets/1693866.pdf?src-supplier=Newark, ComponentLink8Description=http://www.microchip.com/mymicrochip/filehandler.aspx?ddocname=en589968&src-supplier=Digikey, ComponentLink8URL=http://www.microchip.com/mymicrochip/filehandler.aspx?ddocname=en589968&src-supplier=Digikey, ComponentLink9Description=http://www.microchip.com/mymicrochip/filehandler.aspx?ddocname=en608326&src-supplier=Digikey, ComponentLink9URL=http://www.microchip.com/mymicrochip/filehandler.aspx?ddocname=en608326&src-supplier=Digikey, ComponentLink10Description=https://datasheet.octopart.com/ATMEGA328P-AUR-Microchip-datasheet-133520744.pdf?src-supplier=LKR, ComponentLink10URL=https://datasheet.octopart.com/ATMEGA328P-AUR-Microchip-datasheet-133520744.pdf?src-supplier=LKR, ComponentLink11Description=https://datasheet.octopart.com/ATMEGA328P-AUR-Microchip-datasheet-154741723.pdf?src-supplier=Electro+Sonic, ComponentLink11URL=https://datasheet.octopart.com/ATMEGA328P-AUR-Microchip-datasheet-154741723.pdf?src-supplier=Electro+Sonic, ComponentLink12Description=https://datasheet.octopart.com/ATMEGA328P-AUR-Microchip-datasheet-68295846.pdf?src-supplier=SHENGYU+ELECTRONICS, ComponentLink12URL=https://datasheet.octopart.com/ATMEGA328P-AUR-Microchip-datasheet-68295846.pdf?src-supplier=SHENGYU+ELECTRONICS, Contact Plating=154ConductorMaterial, Core Architecture=PIC, Data Bus Width=8b, Height=1.2mm, Interface=I2C,SPI,UART,USART, Lead Free=5697LeadFree, Memory Size=32KB, Memory Type=FLASH, Mount="Surface Mount", Number of ADC Channels=8NUMBER, Number of I2C Channels=1NUMBER, Number of I/Os=23, Number of Pins=32, Number of Programmable I/O=23NUMBER, Number of PWM Channels=6NUMBER, Number of SPI Channels=2NUMBER, Number of Timers/Counters=3NUMBER, Number of UART Channels=1NUMBER, Oscillator Type=Internal, Packaging="Cut Tape", Peripherals="Brown-out Detect/Reset,POR,PWM,WDT", Pricing 1="1=2,74, 25=2,54, 100=2,3 (USD)", RAM Size=2KB, Reach SVHC Compliant=4186SVHC, RoHS=Yes, RoHS Compliant=Yes, Series="PIC® 18F", Stock 1=111026, Supplier 1=Digikey, Watchdog Timer=5512WatchdogTimer
U4: "Linear Voltage Regulator IC Positive Fixed 1 Output 1.8V 300mA SOT-23-5", Manufacturer=Microchip, Manufacturer Part Number=MIC5504-1.8YM5-TR, Supplier Part Number 1=576-4879-6-ND, Category="Voltage Regulators - Linear", ComponentLink1Description=http://www.microchip.com/mymicrochip/filehandler.aspx?ddocname=en580292&src-supplier=Digikey, ComponentLink1URL=http://www.microchip.com/mymicrochip/filehandler.aspx?ddocname=en580292&src-supplier=Digikey, ComponentLink2Description=http://ww1.microchip.com/downloads/en/DeviceDoc/MIC550X.pdf?src-supplier=Farnell, ComponentLink2URL=http://ww1.microchip.com/downloads/en/DeviceDoc/MIC550X.pdf?src-supplier=Farnell, ComponentLink3Description=https://datasheet.octopart.com/MIC5504-1.8YM5-TR-Microchip-datasheet-137404938.pdf?src-supplier=Future+Electronics, ComponentLink3URL=https://datasheet.octopart.com/MIC5504-1.8YM5-TR-Microchip-datasheet-137404938.pdf?src-supplier=Future+Electronics, ComponentLink4Description=http://ww1.microchip.com/downloads/en/DeviceDoc/MIC550X.pdf?src-supplier=Newark, ComponentLink4URL=http://ww1.microchip.com/downloads/en/DeviceDoc/MIC550X.pdf?src-supplier=Newark, ComponentLink5Description=https://datasheet.octopart.com/MIC5504-1.8YM5-TR-Microchip-datasheet-137404938.pdf?src-supplier=Electro+Sonic, ComponentLink5URL=https://datasheet.octopart.com/MIC5504-1.8YM5-TR-Microchip-datasheet-137404938.pdf?src-supplier=Electro+Sonic, Pricing 1="1=0,16, 25=0,12, 100=0,11 (USD)", RoHS=Yes, Stock 1=215403, Supplier 1=Digikey
X1: library part ABLS-12.000MHZ-20-B-3-H-T, "Crystal 12MHz ±25ppm (Tol) ±35ppm (Stability) 20pF FUND 50Ohm 2-Pin HC-49/US SMD T/R", Manufacturer=Abracon, Supplier Part Number 1=535-15006-1-ND, Category=Crystals, ComponentLink1Description=https://abracon.com/Resonators/abls.pdf?src-supplier=Digikey, ComponentLink1URL=https://abracon.com/Resonators/abls.pdf?src-supplier=Digikey, ComponentLink2Description=https://datasheet.octopart.com/ABLS-12.000MHZ-20-B-3-H-T-Abracon-datasheet-139816269.pdf?src-supplier=Electro+Sonic, ComponentLink2URL=https://datasheet.octopart.com/ABLS-12.000MHZ-20-B-3-H-T-Abracon-datasheet-139816269.pdf?src-supplier=Electro+Sonic, Manufacturer Part Number=ABLS-12.000MHZ-20-B-3-H-T, Pricing 1="1=0,19, 10=0,16, 50=0,1444, 100=0,1381, 500=0,12446 (USD)", RoHS=Yes, Stock 1=9001, Supplier 1=Digikey

## Via types
v1: diameter 0.6, hole 0.3, Top Layer to Bottom Layer, tented both sides, 21 vias

## Nets (pads, with @x,y where several pads share a name; then routed paths per layer and width w, separated by ;. In a path a pad name is that pad's centre, name@x,y a point inside that pad or via, vN(x,y) a via of type N, cw(c..) or ccw(c..) an arc to the next point about the centre after c; other vN are vias at no path point)
+1V8: C3.2 C7.1 R2.1 R3.1 U2.6 U2.10 U4.5 | length 46.6
  Top Layer w0.2: U2.10 41.08,26.575 41.505,27 43.6,27 ; U2.6@42.355,24.525 U2.6 42.367,24.55 42.755,24.55 43.6,25.395 43.6,27 ; 48.725,20.625 48.725,26.775 48.5,27 43.6,27
  Top Layer w0.4: R3.1 48.725,20.625 51.156,20.625 54.725,24.194 54.725,25.594 R2.1 ; U4.5@53.14,35 55.547,35 56.7,33.847 C7.1 56.7,29.05 57.2,28.55 59.05,26.7 59.05,25.9 C3.2@58.75,25.6 ; R2.1@54.769,25.6 C3.2@58.75,25.6 ; C3.2 C3.2@58.75,25.6
+5V: C1.1 C5.2 C8.2 J2.6 R4.1 R5.1 U1.4 U3.4 U3.6 U3.18 | length 56.7
  Top Layer w0.4: C5.2@27.4,16.278 27.7,15.978 28.247,15.978 28.775,15.45 U3.6 ; U3.4 27.529,17.05 C5.2 27.4,18.179 33.121,23.9 33.85,23.9 33.975,24.025 R4.1 ; U3.18 44.325,14.65 44.942,14.033 C8.2@46.562,14.033 ; v1(46.262,11.713) 46.262,13.732 C8.2@46.562,14.033 ; R5.1 54.725,8.037 54.6,8.162 54.113,8.162 49.316,12.959 49.316,12.979 48.262,14.033 C8.2 C8.2@46.562,14.033
  Top Layer w0.8: C1.1 6.3,9.55 U1.4 v1(10.5,9.75) ; v1(27.4,13.55) 27.4,15.978 27.4,16.278 C5.2 ; J2.6 v1(48.6,8.94)
+9V_VIN: C2.1 C6.1 D1.2 J1.3 R1.2 U1.1 U4.1 U4.3 | length 71
  Top Layer w0.4: C6.1 47.3,33.4 47.6,33.1 U4.3 ; C6.1@47.3,34.7 47.6,35 U4.1
  Top Layer w0.8: U1.1 D1.2 ; J1.3 11.5,23.15 10.6,23.15 8.9,21.45 8.9,19.85 D1.2 ; C6.1 47.3,34.7 47.3,34.909 45.659,36.55 23.5,36.55 20.815,33.865 20.815,31.05 20.815,26.865 15.651,21.701 15.651,20.205 C2.1 15.496,19.704 15.141,19.35 D1.2
GND: C1.2 C2.2 C3.1 C4.1 C5.1 C6.2 C7.2 C8.1 C9.1 C10.1 D1.1 J1.1 J1.2 J2.4 LED1.2 RT1.1 SW1.1 SW1.3 U1.2 U1.3 U2.3 U2.8 U2.9 U3.3 U3.5 U3.20 U3.21 U4.2 | length 133
  Top Layer w0.2: v1(39.675,23.275) 40.78,23.275 41.08,23.575 U2.3 ; U2.9 41.58,26.248 41.697,26.365 v1(42.7,26.365) 42.623,26.288 42.623,26.093 42.08,25.55 U2.8
  Top Layer w0.4: v1(15.9,3) 15.954,3 16.554,2.4 C9.1 C10.1 v1(31.5,2.4) ; C2.2@18.504,20.718 C2.2 C2.2@19,20.546 ; v1@19.962,22.967 v1(20,23.006) ; LED1.2 25.1,23.45 ; v1(25.1,25.55) 25.1,23.45 ; SW1.1 25.9,29.05 27,27.95 28.4,26.55 28.4,24.55 27.3,23.45 25.1,23.45 ; v1(31,16.25) U3.5 ; v1(31,17.85) U3.3 ; U3.20 45.879,16.25 C8.1@46.262,16.633 ; U3.21 45.844,17.05 C8.1@46.262,16.633 ; C6.2 44.7,32 45.1,31.6 51.266,31.6 52,32.334 52,33.373 51.423,33.95 50.96,33.95 U4.2 v1(49,34.05) ; v1(50.312,16.7) 50.278,16.666 47.295,16.666 C8.1 C8.1@46.262,16.633 ; C3.1@58.856,22.744 C3.1 58.6,21.575 v1(60.075,20.1) 60.037,20.062 60.037,13.588 RT1.1 RT1.1@60.075,13.475 ; C7.2 59.325,32.872 59.325,36 v1(59.35,36.025)
  Top Layer w0.8: v1(2.031,19.35) D1.1 ; C1.2 3.7,6.4 2.031,8.069 2.031,15.081 2.5,15.55 U1.3 ; J1.2 4.133,21.933 D1.1 ; J1.1@5.95,34.75 12.1,34.75 v1(16,34.75) ; U1.2 U1.3 ; C2.2@18.504,20.718 19.962,22.175 v1@19.962,22.967 ; v1(23.5,17.05) 24.8,17.05 C5.1 ; SW1.1 SW1.3 ; v1(42,33.909) C6.2 ; J2.4 v1(48.6,3.86) ; U1.3 3.875,15.625 3.875,19.092 D1.1
MISO: J2.1 U3.16 | length 3.6
  Top Layer w0.4: U3.16 40.2,9.01 J2.1
MOSI: J2.5 U3.15 | length 19.7
  Top Layer w0.4: U3.15 39.325,12.395 39.325,11.569 38.256,10.5 36.7,10.5 35.632,9.432 35.632,6.468 37,5.1 43.475,5.1 44.775,6.4 J2.5
NetLED1_1: LED1.1 R1.1 | length 5.5
  Top Layer w0.4: R1.1@22.185,31.05 22.321,30.914 22.321,25.755 LED1.1
NetR5_2: R5.2 RT1.2 U3.25 | length 30.3
  Top Layer w0.4: U3.25@40.275,20.376 40.2,20.451 U3.25 42.645,20.83 44.942,18.533 51.167,18.533 53,16.7 53,12.8 55.25,10.55 57.362,10.55 ; R5.2 57.362,7.637 57.362,10.55 ; RT1.2 57.362,13.463 57.362,10.55
RESET: C4.2 J2.3 R4.2 SW1.2 SW1.4 U3.29 | length 84.9
  Top Layer w0.4: SW1.4 SW1.2 ; R4.2 34.625,26.45 35.15,26.45 37,26.45 ; U3.29 37,26.45 ; J2.3 39.315,3.86 36.505,1.05 15.789,1.05 14.5,2.339 14.5,12 22.568,20.068 26.518,20.068 31,24.55 31,26.55 33.1,28.65 SW1.2 ; SW1.2 35.35,31.05 37,29.4 37,26.45
SCK: J2.2 U3.17 | length 10.4
  Top Layer w0.4: J2.2 42.365,6.4 43,7.035 43,11.713 41.58,13.133 U3.17
SCL: J3.2 R2.2 U2.2 U3.28 | length 23.7
  Top Layer w0.2: U3.28 37.8,23.875 38.45,24.525 39.4,24.525 ; U2.2 39.4,24.525 ; R2.2@52.139,25.73 R2.2 52.225,26.169 50.659,27.735 49.445,27.735 J3.2 40.67,28.27 39.4,27 39.4,24.525
SDA: J3.1 R3.2 U2.4 U3.27 | length 14.6
  Top Layer w0.2: U3.27 38.6,22.05 39.1,22.55 41.58,22.55 ; U2.4 41.58,22.55 ; J3.1 46.365,25.73 46.9,25.195 R3.2 46.375,23.175 45.75,22.55 41.58,22.55
XTAL1: C9.2 U3.7 X1.2 | length 21.3
  Top Layer w0.381: C9.2 18.5,8.925 X1.2 20.825,9.5 22.375,11.05 28.807,11.05 32.323,14.566 33.135,14.566 U3.7
XTAL2: C10.2 U3.8 X1.1 | length 12.4
  Top Layer w0.381: C10.2 28.5,9.425 X1.1 30.325,9.5 32.756,11.931 32.756,13.766 32.841,13.85 U3.8
pads on no net: J1. U2.1 U2.5 U2.7 U3.1 U3.2 U3.9 U3.10 U3.11 U3.12 U3.13 U3.14 U3.19 U3.22 U3.23 U3.24 U3.26 U3.30 U3.31 U3.32 U4.4

## Polygon pours and split planes (outlines as drawn)
+5V on Bottom Layer "Bottom Layer-+5V" (solid, pour order 11): 51,7.5 45,7.5 45,12.55 16.25,12.55 12.25,8.55 9,8.55 9,11.05 10.5,11.05 10.5,14.55 51,14.55
GND on Bottom Layer "GND_L02_P012" (solid, pour order 12): 1,0.8 61,0.8 61,37.2 1,37.2

## Silkscreen, mask and mechanical layers (free items; w line width, h text height)
Top Overlay:
  text "I2C" at 41.554,28.654 h1.52
  text "Ivan" at 55.254,3.754 h1.52
  text "ISP" at 33.954,3.454 h1.52
  text "Ostapchuk" at 48.254,1.262 h1.52
Bottom Overlay:
  lines w0.2: 36.1,5.108 50.1,5.108 ; 36.1,7.672 50.1,7.672 ; 43.1,1.9 43.1,10.8 ; 44,27 51,27
  lines w0.254: 36.1,1.9 50.1,1.9 50.1,10.9 36.1,10.9 36.1,1.9 ; 44,24 51,24 51,30 44,30 44,24
  text "SCL" at 49.546,27.654 h1.52
  text "SDA" at 49.546,24.754 h1.52
  text "MISO" at 42.246,8.454 h1.52
  text "VCC" at 49.366,8.454 h1.52
  text "SCK" at 42.246,5.654 h1.52
  text "MOSI" at 49.346,5.654 h1.52
  text "GND" at 49.366,2.954 h1.52
  text "RST" at 42.246,2.754 h1.52
Mechanical 1:
  lines w0.2: 0,0 62,0 ; 0,0 0,0 ; 0,0 0,38.05 62,38.05 62,0 ; 62,0 62,0